# Altium PCB PCB3_fresa_v1.1B.pcbdoc
Units mm, origin at the board's own origin, x right, y up, seen from the top; angles counter-clockwise.
Board outline 180.34 x 129.54 mm, 2 copper layers (Top Layer, Bottom Layer); 89 components, 63 nets, 247 pads, 16 vias.
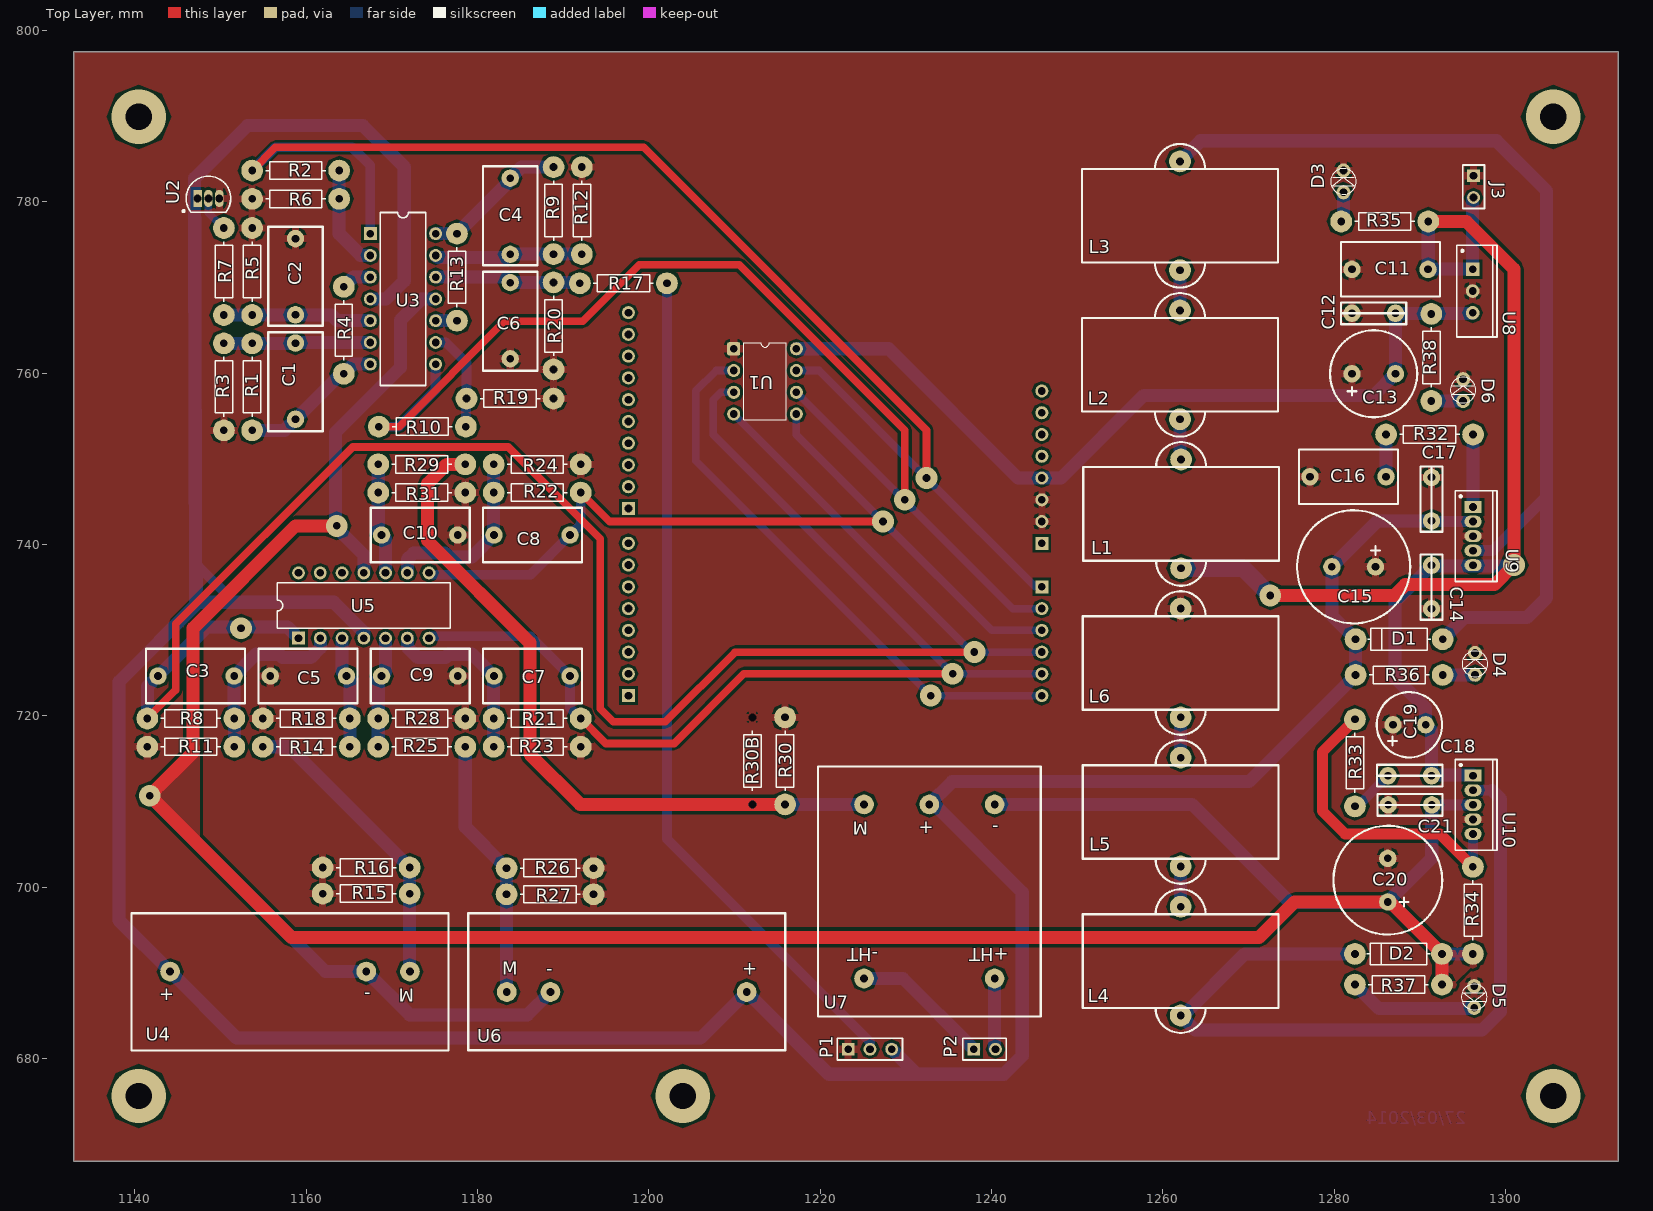
[diagram p0: Top Layer view]
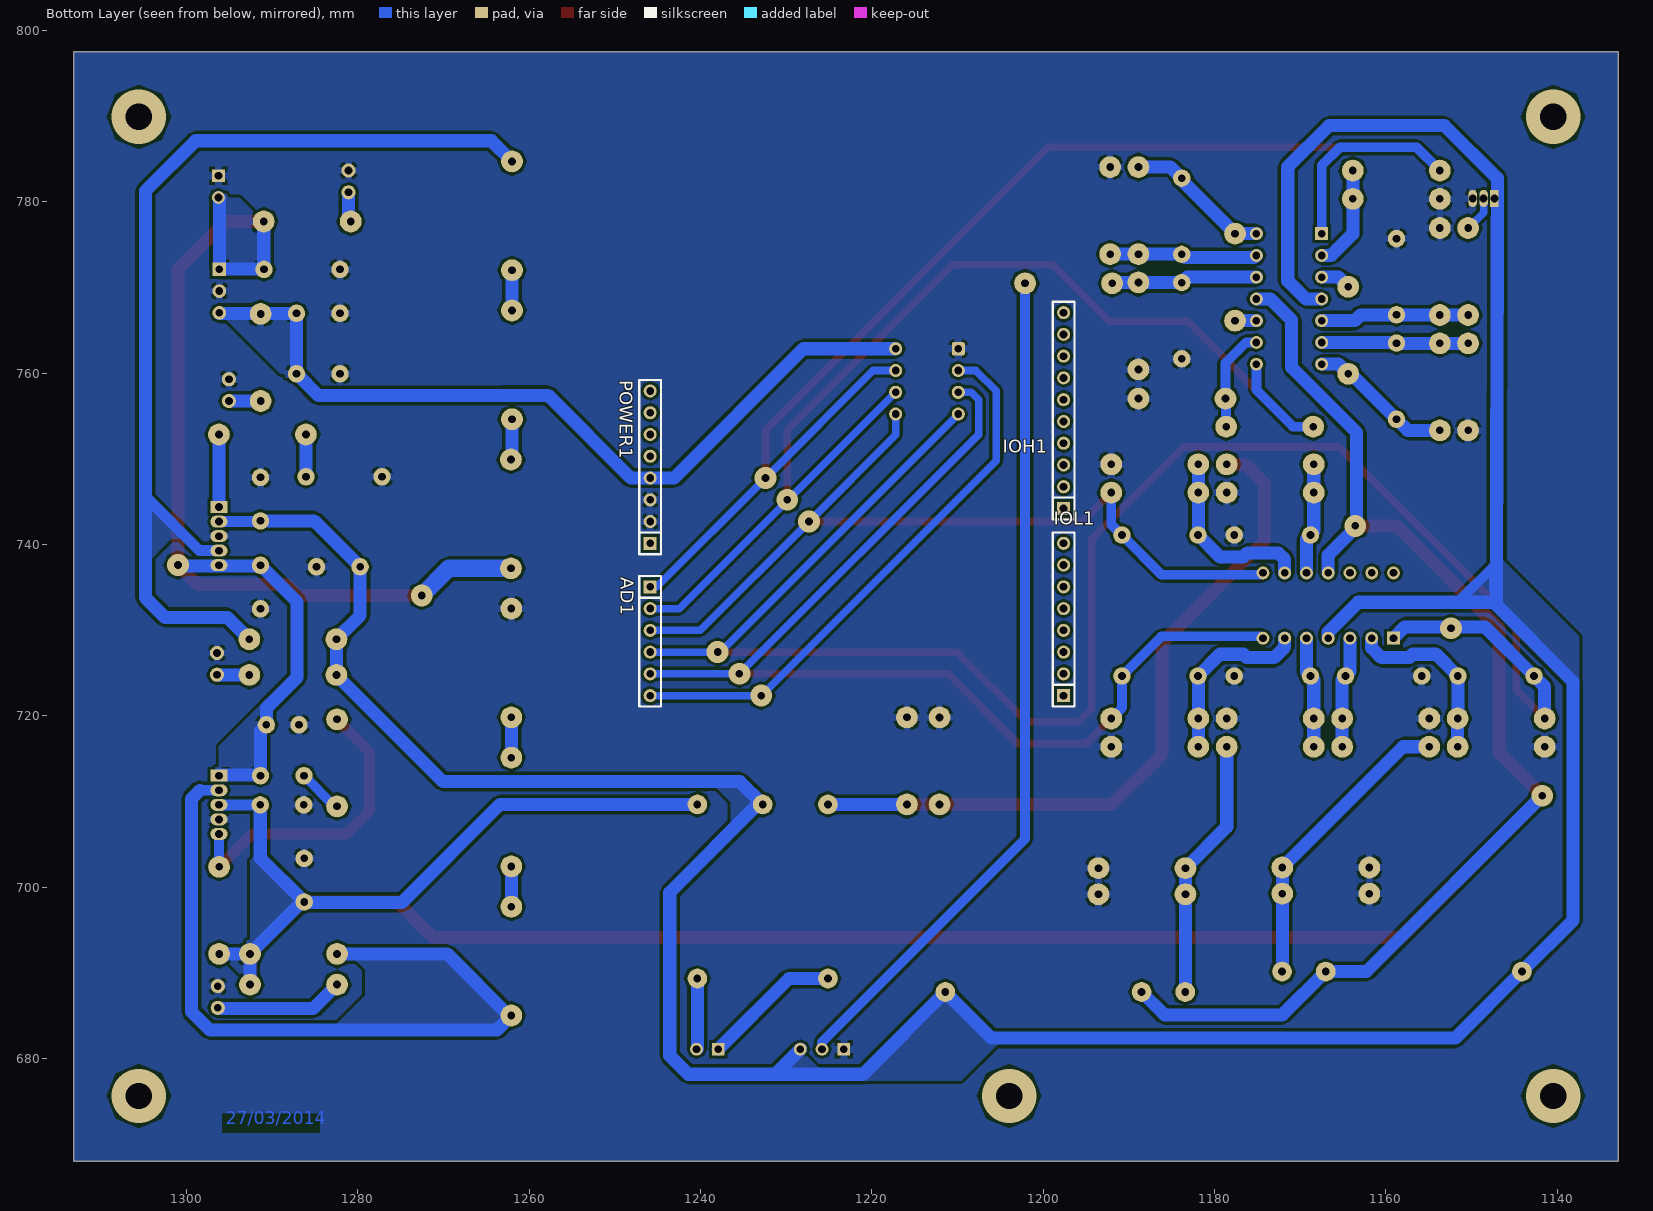
[diagram p1: Bottom Layer view, seen from below]

## Layer stack, top to bottom
Top Layer: signal copper 0.0356
Dielectric: dielectric 0.32, FR-4, Dk 4.8
Bottom Layer: signal copper 0.0356

## Board outline
1132.84,797.56 1313.18,797.56 1313.18,668.02 1132.84,668.02

## Design rules (kind name [scope] priority, off if disabled: settings)
Clearance [All] p1: gap=0.305
ComponentClearance [All] p1: gap=0.254 collisioncheckmode=3 verticalgap=0.762 showdistances=FALSE
HoleSize [All] p1: absolutevalues=TRUE maxlimit=6.35 minlimit=0.8 maxpercent=80.000 minpercent=20.000
HoleToHoleClearance [All] p1: gap=0.203 allowstackedmicrovias=TRUE
PlaneClearance [All] p1: clearance=0.762
PlaneConnect [All] p1: planeconnectstyle=Relief reliefexpansion=0.508 reliefentries=4 reliefconductorwidth=0.889 reliefairgap=0.203
PolygonConnect [All] p1: connectstyle=Relief reliefconductorwidth=0.889 reliefentries=4 polygonreliefangle="90 Angle"
RoomDefinition supplies [InComponentClass('supplies')] p1: confinementstyle=ConfineIn formatcopy=TRUE lockcomponents=FALSE outline 1299.386,682.625 1299.386,787.146 1250.186,787.146 1250.186,682.625
RoutingLayers [All] p1: top layer_v5=FALSE bottom layer_v5=TRUE
RoutingVias [All] p1: holewidth=0.9 width=1.524 viastyle="Through Hole" minholewidth=0.8 minwidth=1.524 maxholewidth=6.35 maxwidth=6.35
SilkscreenOverComponentPads [All] p1: minsilkscreentomaskgap=0.254
SolderMaskExpansion [All] p1: expansion=0.102
SupplyNets 3V3 [InNet('3V3')] p1: voltage=3.000
SupplyNets 5V_1 [InNet('5V')] p2: voltage=5.000
SupplyNets -15V_1 [InNet('-15V')] p3: voltage=-15.00
SupplyNets +15V_1 [InNet('+15V')] p4: voltage=15.00
SupplyNets +12V_1 [InNet('+12V')] p5: voltage=12.00
Width 5V [InNet('5V')] p1: maxlimit=1.524 minlimit=0.889 preferedwidth=1.143
Width -15V [InNet('-15V')] p2: maxlimit=2.032 minlimit=1.143 preferedwidth=1.524
Width +15V [InNet('+15V')] p3: maxlimit=2.032 minlimit=1.143 preferedwidth=1.524
Width +12V [InNet('+12V')] p4: maxlimit=2.54 minlimit=1.524 preferedwidth=2.032
Width [All] p5: maxlimit=1.524 minlimit=0.889 preferedwidth=1.143
21 further rules are at their usual default settings.

## Classes and differential pairs
component class arduinoshield: AD1 IOH1 IOL1 POWER1 U1
component class sensor: C1 C2 C3 C4 C5 C6 C7 C8 C9 C10 P1 P2 R1 R2 R3 R4 R5 R6 R7 R8 R9 R10 R11 R12 R13 R14 R15 R16 R17 R18 R19 R20 R21 R22 R23 R24 R25 R26 R27 R28 R29 R30 R30B R31 U2 U3 U4 U5 U6 U7
component class supplies: C11 C12 C13 C14 C15 C16 C17 C18 C19 C20 C21 D1 D2 D3 D4 D5 D6 J3 L1 L2 L3 L4 L5 L6 R32 R33 R34 R35 R36 R37 R38 U8 U9 U10

## Components (designator, comment, footprint, x,y, rotation, side; value= is the part's Value field where it differs from the comment)
AD1 "AD" "Header 6x1 8.5mm" 1245.87,735.076 r270 bottom locked
C1 "approved sub OK" cap33n63v 1158.748,763.524 r270 top locked
C2 "approved sub OK" cap33n63v 1158.748,766.826 r90 top locked
C3 "approved sub OK" cap33n63v 1151.585,724.662 r180 top locked
C4 "approved sub OK" cap33n63v 1183.818,773.887 r90 top locked
C5 "approved sub OK" cap33n63v 1164.7,724.662 r180 top locked
C6 "approved sub OK" cap33n63v 1183.818,770.585 r270 top locked
C7 "approved sub OK" cap33n63v 1181.913,724.662 r0 top locked
C8 "approved sub OK" cap33n63v 1181.913,741.121 r0 top locked
C9 "approved sub OK" cap33n63v 1168.798,724.662 r0 top locked
C10 "approved sub OK" cap33n63v 1168.798,741.121 r0 top locked
C11 "approved sub OK" cap33n63v 1282.063,772.135 r0 top locked
C12 "approved sub OK" cap100n 1282.063,767.004 r0 top locked
C13 "approved sub OK" cap1000u25v 1282.063,759.943 r0 top locked
C14 "approved sub OK" cap100n 1291.36,732.511 r90 top locked
C15 "approved sub OK" cap2200u25v 1284.806,737.413 r180 top locked
C16 "approved sub OK" cap33n63v 1277.161,747.928 r0 top locked
C17 "approved sub OK" cap100n 1291.36,747.852 r270 top locked
C18 "approved sub OK" cap100n 1286.28,713.029 r0 top locked
C19 "approved sub OK" cap100u35v 1286.864,718.972 r0 top locked
C20 "approved sub OK" cap470u50v 1286.254,698.297 r90 top locked
C21 "approved sub OK" cap100n 1291.385,709.625 r180 top locked
D1 "MUR160" DO-41 1287.575,728.955 r90 top locked
D2 "MUR160" DO-41 1287.499,692.226 r90 top locked
D3 "LED" LED-3MM-BLUE 1281.073,781.126 r90 top locked
D4 "LED" LED-3MM-BLUE 1296.44,724.814 r90 top locked
D5 "LED" LED-3MM-BLUE 1296.338,688.467 r270 top locked
D6 "LED" LED-3MM-BLUE 1295.043,756.768 r90 top locked
IOH1 "IOH" "Header 10x1 8.5mm" 1197.61,744.22 r90 bottom locked
IOL1 "IOL" "Header 8x1 8.5mm" 1197.61,722.376 r90 bottom locked
J3 "Header 2" HDR1X2 1296.262,783.057 r270 top locked
L1 "INDC_180u_Toroid" Inductor 1262.124,743.585 r180 top locked
L2 "INDC_180u_Toroid" Inductor 1261.997,760.984 r180 top locked
L3 "INDC_180u_Toroid" Inductor 1261.997,778.383 r180 top locked
L4 "INDC_180u_Toroid" Inductor 1262.073,691.388 r180 top locked
L5 "INDC_180u_Toroid" Inductor 1262.073,708.787 r180 top locked
L6 "INDC_180u_Toroid" Inductor 1262.073,726.186 r180 top locked
P1 "Header 3" HDR1X3 1223.264,681.101 r0 top locked
P2 "Header 2" HDR1X2 1237.92,681.101 r0 top locked
POWER1 "POWER_UNO" "Header 8x1 8.5mm" 1245.87,740.156 r90 bottom locked
R1 "Carbon Film" RESTH_AXIAL-0.4#1 1153.693,758.419 r270 top locked
R2 "Carbon Film" RESTH_AXIAL-0.4#1 1158.773,783.666 r0 top locked
R3 "Carbon Film" RESTH_AXIAL-0.4#1 1150.391,758.419 r90 top locked
R4 "Carbon Film" RESTH_AXIAL-0.4#1 1164.387,765.023 r270 top locked
R5 "Carbon Film" RESTH_AXIAL-0.4#1 1150.391,771.881 r270 top locked
R6 "Carbon Film" RESTH_AXIAL-0.4#1 1158.773,780.364 r180 top locked
R7 "Carbon Film" RESTH_AXIAL-0.4#1 1153.693,771.881 r90 top locked
R8 "Carbon Film" RESTH_AXIAL-0.4#1 1146.531,719.709 r180 top locked
R9 "Carbon Film" RESTH_AXIAL-0.4#1 1188.872,778.993 r90 top locked
R10 "Carbon Film" RESTH_AXIAL-0.4#1 1173.556,753.77 r0 top locked
R11 "Carbon Film" RESTH_AXIAL-0.4#1 1146.531,716.407 r0 top locked
R12 "Carbon Film" RESTH_AXIAL-0.4#1 1192.174,778.993 r270 top locked
R13 "Carbon Film" RESTH_AXIAL-0.4#1 1177.595,771.22 r90 top locked
R14 "Carbon Film" RESTH_AXIAL-0.4#1 1160.01,716.407 r0 top locked
R15 "Carbon Film" RESTH_AXIAL-0.4#1 1167.003,699.262 r180 top locked
R16 "Carbon Film" RESTH_AXIAL-0.4#1 1167.003,702.31 r180 top locked
R17 "Carbon Film" RESTH_AXIAL-0.4#1 1197.026,770.509 r180 top locked
R18 "Carbon Film" RESTH_AXIAL-0.4#1 1160.01,719.709 r180 top locked
R19 "Carbon Film" RESTH_AXIAL-0.4#1 1183.792,757.047 r0 top locked
R20 "Carbon Film" RESTH_AXIAL-0.4#1 1188.872,765.531 r270 top locked
R21 "Carbon Film" RESTH_AXIAL-0.4#1 1186.967,719.709 r0 top locked
R22 "Carbon Film" RESTH_AXIAL-0.4#1 1186.967,746.074 r0 top locked
R23 "Carbon Film" RESTH_AXIAL-0.4#1 1186.967,716.407 r180 top locked
R24 "Carbon Film" RESTH_AXIAL-0.4#1 1186.967,749.376 r180 top locked
R25 "Carbon Film" RESTH_AXIAL-0.4#1 1173.488,716.407 r180 top locked
R26 "Carbon Film" RESTH_AXIAL-0.4#1 1188.466,702.234 r0 top locked
R27 "Carbon Film" RESTH_AXIAL-0.4#1 1188.466,699.186 r0 top locked
R28 "Carbon Film" RESTH_AXIAL-0.4#1 1173.488,719.709 r0 top locked
R29 "Carbon Film" RESTH_AXIAL-0.4#1 1173.488,749.376 r180 top locked
R30 "Carbon Film" RESTH_AXIAL-0.4#1 1215.898,714.756 r90 top locked
R30B "Carbon Film" RESTH_AXIAL-0.4#2 1212.088,714.756 r90 top
R31 "Carbon Film" RESTH_AXIAL-0.4#1 1173.488,746.074 r0 top locked
R32 "Carbon Film" RESTH_AXIAL-0.4#1 1291.131,752.856 r180 top locked
R33 "Carbon Film" RESTH_AXIAL-0.4#1 1282.419,714.527 r90 top locked
R34 "Carbon Film" RESTH_AXIAL-0.4#1 1296.186,697.306 r90 top locked
R35 "Carbon Film" RESTH_AXIAL-0.4#1 1285.899,777.723 r0 top locked
R36 "Carbon Film" RESTH_AXIAL-0.4#1 1287.575,724.789 r180 top locked
R37 "Carbon Film" RESTH_AXIAL-0.4#1 1287.499,688.645 r0 top locked
R38 "Carbon Film" RESTH_AXIAL-0.4#1 1291.334,761.848 r90 top locked
U1 "TL7726" DIP8-300 1213.561,759.054 r0 top locked
U2 "LM35" Z03A 1148.588,780.415 r270 top locked
U3 "LM324AJ" J014 1171.296,768.68 r270 top locked
U4 "LA150-P" LA150-P 1172.108,690.169 r180 top locked
U5 "LM324AJ" J014 1166.724,732.892 r0 top locked
U6 "LA150-P" LA150-P 1183.411,687.781 r0 top locked
U7 "LV20-P" LV20-P 1240.358,689.356 r180 top locked
U8 "LM7805" T03B 1296.161,769.595 r270 top locked
U9 "LM2577" T05A 1296.211,740.994 r270 top locked
U10 "LM2575-15" T05A 1296.211,709.625 r270 top locked

## Footprints (in the part's own frame and the unit in brackets; to place one, negate y for a bottom-side part, rotate by r counter-clockwise, add the part's x,y. Pads: shape width x height; smd on the part's side, far side on the other; paste and mask are expansions set on the pad)
cap33n63v [mil]
  round 80 hole 35.43: 1(0,0) 2(350,0)
  silkscreen extent -50,-125 405,125
cap100n [mil]
  round 80 hole 35.43: 1(0,0) 2(200,0)
  silkscreen extent -50,-50 250,50
cap100u35v [mil]
  round 80 hole 35.43: 1(0,0) 2(150,0)
  silkscreen extent -75,-150 225,150
cap470u50v [mil]
  round 80 hole 35.43: 1(0,0) 2(200,0)
  silkscreen extent -150,-250 350,250
cap1000u25v [mil]
  round 80 hole 35.43: 1(0,0) 2(200,0)
  silkscreen extent -100,-200 300,200
cap2200u25v [mil]
  round 80 hole 35.43: 1(0,0) 2(200,0)
  silkscreen extent -160,-260 360,260
DIP8-300 [mil] "DIP, 8-Leads, 0.300\" lead span , 0.100\" lead pitch, IPC Density A"
  round 39.37 on Mech14: 0(0,0)
  rrect25% 60x60 hole 35.43: 1(-144,150)
  round 60 hole 35.43: 2(-144,50) 3(-144,-50) 4(-144,-150) 5(144,-150) 6(144,-50) 7(144,50) 8(144,150)
  silkscreen extent -98,-177 98,177, body extent -98,-177 98,177, height 210
DO-41 [mm] "Diode, thru-hole"
  round 2.54 hole 0.9: A(0,-5.08) K(0,5.08)
  silkscreen extent -1.27,-3.68 1.27,3.68
HDR1X2 [mm] "Connector; Header; 2 Position"
  rect 1.5x1.5 hole 0.9: 1(0,0)
  round 1.5 hole 0.9: 2(2.54,0)
  silkscreen extent -1.27,-1.27 3.81,1.27
HDR1X3 [mm] "Connector; Header; 3 Position"
  rect 1.5x1.5 hole 0.9: 1(0,0)
  round 1.5 hole 0.9: 2(2.54,0) 3(5.08,0)
  silkscreen extent -1.27,-1.27 6.35,1.27
"Header 6x1 8.5mm" [mil] "Stackable 6 pin header"
  rect 60x60 hole 35.43: 1(0,0)
  round 60 hole 35.43: 2(100,0) 3(200,0) 4(300,0) 5(400,0) 6(500,0)
  silkscreen extent -50,-50 550,50
"Header 8x1 8.5mm" [mil] "Stackable 8 pin header"
  rect 60x60 hole 35.43: 1(0,0)
  round 60 hole 35.43: 2(100,0) 3(200,0) 4(300,0) 5(400,0) 6(500,0) 7(600,0) 8(700,0)
  silkscreen extent -50,-50 750,50
"Header 10x1 8.5mm" [mil] "Stackable 10 pin header"
  rect 60x60 hole 35.43: 1(0,0)
  round 60 hole 35.43: 2(100,0) 3(200,0) 4(300,0) 5(400,0) 6(500,0) 7(600,0) 8(700,0) 9(800,0) 10(900,0)
  silkscreen extent -50,-50 950,50
Inductor [mm] "Toroidal Inductor"
  round 2.54 hole 0.9: 1(0,6.35) 2(0,-6.35)
  silkscreen extent -11.43,-8.38 11.43,8.38
J014 [mm] "DIP; 14 Leads; Row Spacing 7.62 mm; Pitch 2.54 mm"
  rect 1.5x1.5 hole 0.9: 1(-7.62,-3.81)
  round 1.5 hole 0.9: 2(-5.08,-3.81) 3(-2.54,-3.81) 4(0,-3.81) 5(2.54,-3.81) 6(5.08,-3.81) 7(7.62,-3.81) 8(7.62,3.81) 9(5.08,3.81) 10(2.54,3.81) 11(0,3.81) 12(-2.54,3.81) 13(-5.08,3.81) 14(-7.62,3.81)
  silkscreen extent -10.1,-2.65 10.1,2.65
LA150-P [mm] "Current Transducer"
  round 2.3 hole 0.9: 1(0,0) 2(5.1,0) 3(28,0)
  silkscreen extent -4.5,-6.8 32.5,9.2
LED-3MM-BLUE [mil]
  round 65 hole 35.43: A(0,0) K(100,0)
  silkscreen extent -9,-59 109,59, body extent -15,-63 114,67, height 250
LV20-P [mm] "Voltage Transducer LV 20-P"
  round 2.3 hole 0.9: 1(0,-20.32) 2(7.62,-20.32) 3(15.24,-20.32) 4(0,0) 5(15.24,0)
  silkscreen extent -5.38,-24.76 20.62,4.44
RESTH_AXIAL-0.4#1 [mm]
  round 2.54 hole 0.9: 1(-5.08,0) 2(5.08,0)
  silkscreen extent -3.5,-1.02 3.5,1.02
RESTH_AXIAL-0.4#2 [mm]
  round 0 / inner round 0 / far side round 2.54 hole 0.914: 1(-5.08,0) 2(5.08,0)
  silkscreen extent -3.5,-1.02 3.5,1.02, body extent -5.38,-1.28 5.38,1.28, height 2.6
T03B [mm] "TO, Thru-Hole, Vertical, Heatsink Mounted; 3 In-Line Leads; Pitch 2.54 mm"
  rect 1.6x1.6 hole 0.9: 1(-2.54,0)
  round 1.6 hole 0.9: 2(0,0) 3(2.54,0)
  silkscreen extent -5.35,-1.85 5.35,2.85, body extent -5.35,-1.85 5.35,2.85, height 19.4
T05A [mm] "TO, Thru-Hole, Vertical, Heatsink Mounted; 5 In-Line Leads; Pitch 1.70 mm"
  rect 1.4x2 hole 0.9: 1(-3.4,0)
  oval 1.4x2 hole 0.9: 2(-1.7,0) 3(0,0) 4(1.7,0) 5(3.4,0)
  silkscreen extent -5.3,-2.1 5.3,2.8, body extent -5.3,-2.1 5.3,2.8, height 15.9
Z03A [mm] "TO, Flat Index; 3 In-Line, Axial Leads; Body Dia. 5mm; Leads 0.55 x 0.50 mm (max)"
  rect 2x1 hole 0.9: 1(0,-1.27)
  oval 2x1 hole 0.9: 2(0,0) 3(0,1.27)
  silkscreen extent -2.6,-3.02 1.6,2.6, body extent -2.61,-2.61 1.6,2.61, height 5.2

## Part data
C1 C2 C3 C4 C5 C6 C7 C8 C9 C10 C11 C12 C13 C14 C15 C16 C17 C18 C19 C20 C21: library part CAPC_330n_0805, "Capacitor SMD Cer 330nF 10% 25V X7R 0805"
D1 D2: library part DIODE_1N4007_1000V_1.0A_DO-41, "Diode 1N4007 1A 1000V THD"
D3 D4 D5 D6: library part LED-BLUE-3MM, "LED-BLUE-3MM"
J3 P2: "Header, 2-Pin"
L1 L2 L3 L4 L5 L6: "Power Inductor 180µH 10% SMD Toroid"
P1: "Header, 3-Pin"
R1 R2 R3 R4 R5 R6 R7 R8 R9 R10 R11 R12 R13 R14 R15 R16 R17 R18 R19 R20 R21 R22 R23 R24 R25 R26 R27 R28 R29 R30 R30B R31 R32 R33 R34 R35 R36 R37 R38: library part RES_1K_Axial_0.25W_5%, "Resistor THD Axial 1k Ohm 0.25W 5% Carbon Film"
U1: "Hex Clamping Circuit - Overvoltage Limiter"
U2: library part LM35CAZ, "Precision Centigrade Temperature Sensor, 3-pin TO-92"
U3 U5: "Quadruple Operational Amplifier"
U4 U6: "Current Transducer"
U7: "Voltage Transducer"
U8: library part LM78M05CT, "3-Terminal Positive Voltage Regulators, 3-pin TO-220"
U9: "Boost"
U10: library part LM2575, "Buck"

## Via types
v1: diameter 2.54, hole 0.9, Top Layer to Bottom Layer, 11 vias
v2: diameter 6.35, hole 3.048, Top Layer to Bottom Layer, 5 vias

## Nets (pads, with @x,y where several pads share a name; then routed paths per layer and width w, separated by ;. In a path a pad name is that pad's centre, name@x,y a point inside that pad or via, vN(x,y) a via of type N, cw(c..) or ccw(c..) an arc to the next point about the centre after c; other vN are vias at no path point)
3V3: POWER1.5
5V: C12.2 C13.2 POWER1.4 R38.2 U1.8 U8.3 | length 97.3
  Bottom Layer w1.524: U1.8 1227.988,762.864 1243.076,747.776 POWER1.4 1248.131,747.776 1257.783,757.428 1263.154,757.428 1263.18,757.403 1284.603,757.403 C13.2 C12.2 U8.3@1296.11,767.004
+12V: C11.2 C14.2 C18.2 C19.2 J3.2 L1.1 R35.2 U8.1 U9.5 U10.1 | length 150.3
  Top Layer w1.524: v1(1272.54,734.06) 1287.018,734.06 1288.288,735.33 1298.702,735.33 v1(1300.988,737.616) 1300.988,772.16 1295.425,777.723 R35.2 ; C14.2 C14.2@1291.363,737.594
  Bottom Layer w1.524: R35.2 1290.979,772.16 1296.136,772.16 U8.1 1296.161,780.416 J3.2 ; C18.2 C18.2@1291.36,713.105 ; C14.2@1291.36,737.514 U9.5@1296.211,737.514 ; C14.2 1287.069,733.3 1287.069,724.51 1290.674,720.905 C19.2 1291.36,718.287 C18.2@1291.36,713.105 ; U10.1@1296.211,713.105 C18.2@1291.36,713.105 ; U9.5@1296.211,737.518 v1@1300.966,737.518 ; v1@1300.966,737.594 v1(1300.988,737.616)
  Bottom Layer w2.032: L1.1 1269.365,737.235 v1(1272.54,734.06)
+15V: C15.2 C17.2 D1.K P1.3 R36.2 U2.1 U3.4 U4.3 U5.4 U6.3 U7.2 U9.2 | length 412.6
  Bottom Layer w1.143: 1147.293,737.591 1147.318,737.565 1151.611,733.273
  Bottom Layer w1.27: 1147.318,734.822 1147.318,737.565 ; C17.2@1291.461,742.694 U9.2
  Bottom Layer w1.524: 1146.975,778.115 1146.975,782.815 ; 1146.988,778.102 1147.064,733.552 ; 1147.051,782.815 1153.16,788.924 1166.622,788.924 1171.448,784.098 1171.448,770.788 1169.34,768.68 U3.4 ; U5.4 1166.724,729.775 1163.226,733.273 1151.611,733.273 1147.42,733.273 1138.174,724.027 1138.174,696.103 U4.3 1151.881,682.396 1206.027,682.396 U6.3 1221.013,678.18 1231.265,678.18 ; P1.3 1231.265,678.18 ; C17.2@1291.461,742.671 C17.2 1285.086,742.772 C15.2 1279.726,731.723 D1.K R36.2 1270.049,712.343 1241.473,712.343 1241.466,712.35 1239.251,712.35 1239.244,712.343 1235.405,712.343 U7.2 1233.297,709.676 1243.584,699.389 1243.584,680.339 1241.425,678.18 1231.265,678.18
-15V: C20.1 C21.1 D2.A R34.1 R37.2 U3.11 U4.2 U5.11 U6.2 U7.1 U10.3 | length 391.7
  Top Layer w1.524: v1(1141.73,710.692) 1158.265,694.157 1271.245,694.157 1275.385,698.297 C20.1 1286.508,698.297 D2.A R37.2 ; v1@1141.755,710.717 1146.81,715.772 1146.81,730.25 1158.748,742.188 v1(1163.574,742.188) ; U7.1@1240.358,709.422 U7.1
  Bottom Layer w1.27: C21.1 U10.3
  Bottom Layer w1.524: v1(1141.73,710.692) 1162.253,690.169 U4.2 1172.07,685.107 1185.837,685.107 U6.2 ; U5.11 1166.724,738.784 1163.396,742.112 1163.396,753.085 1170.991,760.679 1170.991,766.191 1173.48,768.68 U3.11 ; U7.1 1263.396,709.676 1274.826,698.246 1286.203,698.246 C20.1 ; C21.1 1291.385,703.428 C20.1 ; R37.2 D2.A ; R34.1 D2.A ; C20.1 1286.508,698.297 D2.A
AD0: AD1.1 R2.1 U1.7 U3.1 | length 162
  Top Layer w0.889: R2.1 1156.411,786.384 1199.388,786.384 1232.408,753.364 v1(1232.408,747.776)
  Bottom Layer w0.889: U1.7 1219.86,760.324 v1(1232.408,747.776) 1245.108,735.076 AD1.1
  Bottom Layer w1.143: R2.1 1156.411,786.384 1165.352,786.384 1167.486,784.25 U3.1
AD1: AD1.2 R10.1 U1.6 U3.8 | length 135.9
  Top Layer w0.889: R10.1 1170.838,753.77 1183.132,766.064 1192.276,766.064 1198.88,772.668 1210.564,772.668 1229.868,753.364 v1(1229.868,745.236)
  Bottom Layer w0.889: U1.6 1242.466,732.536 AD1.2
  Bottom Layer w1.143: R10.1 1170.838,753.77 1175.106,758.038 U3.8
AD2: AD1.3 C8.2 R22.2 U1.5 U5.8 | length 101.6
  Top Layer w0.889: R22.2@1192.454,746.074 R22.2 1195.426,742.696 v1(1227.328,742.696)
  Bottom Layer w0.889: U1.5 1217.219,752.805 v1(1227.328,742.696) 1240.028,729.996 AD1.3
  Bottom Layer w1.143: U5.8 1174.559,736.486 1186.167,736.486 C8.2 1192.047,742.366 R22.2
AD3: AD1.4 C3.2 R8.2 U1.4 U5.1 | length 214.7
  Top Layer w0.889: R8.2 1144.778,723.036 1144.778,730.758 1165.416,751.395 1183.576,751.395 1194.308,740.664 1194.308,720.852 1195.832,719.328 1201.928,719.328 1210.056,727.456 v1(1237.996,727.456)
  Bottom Layer w0.889: U1.4 1237.691,727.456 v1(1237.996,727.456) AD1.4
  Bottom Layer w1.524: R8.2 1141.451,723.417 C3.2 1148.436,730.402 1157.795,730.402 U5.1@1159.104,729.094
  other v1: 1152.398,730.25
AD4: AD1.5 C7.2 R21.2 U1.3 U5.7 | length 128.7
  Top Layer w0.889: R21.2 1194.968,716.788 1202.944,716.788 1211.072,724.916 v1(1235.456,724.916)
  Bottom Layer w0.889: U1.3 1208.38,757.784 1207.516,756.92 1207.516,752.856 v1(1235.456,724.916) AD1.5
  Bottom Layer w1.143: U5.7 1174.559,729.298 1186.167,729.298 C7.2 1190.803,720.954 R21.2
AD5: AD1.6 U1.2 | length 65.3
  Bottom Layer w0.889: U1.2 1207.872,760.324 1205.484,757.936 1205.484,749.808 v1(1232.916,722.376) AD1.6
GND: C2.2 C5.2 C6.2 C9.2 C10.2 C11.1 C12.1 C13.1 C14.1 C15.1 C16.1 C17.1 C19.1 C20.2 C21.2 D3.K D4.K D5.A D6.K J3.1 L6.2 P1.1 POWER1.2 POWER1.3 R3.1 R6.2 R7.2 R11.1 R12.1 R15.2 R16.2 R18.2 R19.2 R20.2 R23.1 R24.1 R26.2 R27.2 R28.2 R30.2 R30B.2 R31.2 U1.1 U2.3 U8.2 U9.3 U10.4
IO0: IOL1.1
IO1: IOL1.2
IO2: IOL1.3
IO3: IOL1.4
IO4: IOL1.5
IO5: IOL1.6
IO6: IOL1.7
IO7: IOL1.8
IOREF: POWER1.7
MISO: 
MOSI: 
NetC1_1: C1.1 R1.1 R3.2 U3.6 | length 17.1
  Bottom Layer w1.524: R3.2 R1.1 1158.723,763.499 C1.1 1158.824,763.6 U3.6
NetC1_2: C1.2 R1.2 R4.2 U3.7 | length 17
  Bottom Layer w1.524: R1.2 1157.453,753.339 C1.2 1164.057,759.943 R4.2 1165.504,761.06 U3.7
NetC2_1: C2.1 R5.2 R7.1 U3.5 | length 17.4
  Bottom Layer w1.524: R5.2 R7.1 1158.723,766.801 C2.1 1162.939,766.826 1163.625,766.14 U3.5
NetC3_1: C3.1 R8.1 R11.2 U5.2 | length 21.2
  Bottom Layer w1.524: R11.2 R8.1 1151.585,719.734 C3.1 1154.125,727.202 1156.862,727.202 1157.257,726.808 1160.513,726.808 1161.644,727.939 U5.2
NetC4_1: C4.1 R9.1 R12.2 U3.13 | length 17.3
  Bottom Layer w1.524: U3.13 1175.36,773.506 1183.437,773.506 C4.1 1183.843,773.913 R9.1 R12.2
NetC4_2: C4.2 R9.2 R13.2 U3.14 | length 17.1
  Bottom Layer w1.524: U3.14 R13.2 1183.818,782.523 C4.2 1185.113,784.073 R9.2
NetC5_1: C5.1 R14.2 R18.1 U5.3 | length 13
  Bottom Layer w1.524: U5.3 1164.184,725.178 C5.1 1165.09,724.273 R18.1 R14.2
NetC6_1: C6.1 R17.2 R20.1 U3.12 | length 17.3
  Bottom Layer w1.524: U3.12 1183.183,771.22 C6.1 1188.847,770.585 R20.1 R17.2@1192.174,770.611
NetC7_1: C7.1 R21.1 R23.2 U5.6 | length 21.1
  Bottom Layer w1.524: U5.6 1171.804,728.04 1173.036,726.808 1176.241,726.808 1176.636,727.202 1179.373,727.202 C7.1 1181.887,724.637 R21.1 R23.2
NetC8_1: C8.1 R22.1 R24.2 U5.9 | length 21.5
  Bottom Layer w1.524: U5.9 1171.804,738.276 1172.531,739.003 1176.214,739.003 1176.636,738.581 1179.373,738.581 C8.1 1181.887,741.147 R22.1 R24.2
NetC9_1: C9.1 R25.2 R28.1 U5.5 | length 13
  Bottom Layer w1.524: R25.2 R28.1 1168.408,724.273 C9.1 1169.264,725.128 U5.5
NetC10_1: C10.1 R29.2 R31.1 U5.10 | length 13
  Bottom Layer w1.524: R29.2 R31.1 1168.408,741.511 C10.1 1169.264,740.656 U5.10
NetC16_2: C16.2 R32.2 | length 4.9
  Bottom Layer w1.524: C16.2 R32.2
NetC18_1: C18.1 R33.1 | length 5.3
  Bottom Layer w1.143: R33.1 1282.698,709.447 C18.1
NetD1_A: D1.A L3.2 U9.4 | length 119.1
  Bottom Layer w1.27: U9.4 1298.475,739.294 1304.798,745.617
  Bottom Layer w1.524: L3.2 1264.41,787.146 1298.931,787.146 1304.798,781.279 1304.798,745.617 1304.798,733.806 1302.512,731.52 1295.22,731.52 D1.A
NetD2_K: D2.K L4.1 U10.2 | length 90.7
  Bottom Layer w1.27: U10.2 1298.421,711.325
  Bottom Layer w1.524: D2.K 1269.568,692.226 1262.38,685.038 L4.1 1263.775,683.336 1297.254,683.336 1299.413,685.495 1299.413,710.333 1298.421,711.325
NetD3_A: D3.A R35.1 | length 3.5
  Bottom Layer w1.524: R35.1 1281.073,777.977 D3.A
NetD4_A: D4.A R36.1 | length 3.8
  Bottom Layer w1.524: R36.1 1296.414,724.789 D4.A
NetD5_K: D5.K R37.1 | length 15.1
  Bottom Layer w1.524: R37.1 1285.213,685.851 1296.262,685.851 D5.K
NetD6_A: D6.A R38.1 | length 3.7
  Bottom Layer w1.524: R38.1 D6.A
NetL1_2: L1.2 L2.1 | length 4.6
  Bottom Layer w1.524: L1.2@1261.997,750.062 L2.1
NetL2_2: L2.2 L3.1 | length 4.7
  Bottom Layer w1.524: L2.2 L3.1
NetL4_2: L4.2 L5.1 | length 4.7
  Bottom Layer w1.524: L4.2 L5.1
NetL5_2: L5.2 L6.1 | length 4.7
  Bottom Layer w1.524: L5.2 L6.1
NetP1_2: P1.2 R17.1 | length 99.2
  Bottom Layer w1.143: R17.1 1202.106,705.645 1225.804,681.947 P1.2
NetP2_1: P2.1 U7.5 | length 16.2
  Bottom Layer w1.524: U7.5 1229.665,689.356 P2.1
NetP2_2: P2.2 U7.4 | length 8.2
  Bottom Layer w1.524: P2.2@1240.358,681.203 U7.4
NetR2_2: R2.2 R6.1 U3.2 | length 12.1
  Bottom Layer w1.524: R2.2 R6.1 1163.853,776.277 1166.37,773.76 U3.2
NetR4_1: R4.1 U3.3 | length 3.6
  Bottom Layer w1.524: R4.1 1165.504,771.22 U3.3
NetR5_1: R5.1 U2.2 | length 4.2
  Bottom Layer w0.889: U2.2 1148.588,778.764 R5.1
NetR10_2: R10.2 R19.1 U3.9 | length 12.1
  Bottom Layer w1.143: U3.9 1176.299,763.6 1178.712,761.187 R19.1 1178.636,756.971 R10.2
NetR13_1: R13.1 U3.10 | length 2.5
  Bottom Layer w1.524: U3.10 R13.1
NetR14_1: R14.1 R15.1 R16.1 U4.1 | length 35.1
  Bottom Layer w1.524: R14.1 1157.986,716.407 R16.1 R15.1 U4.1@1172.083,690.194
NetR25_1: R25.1 R26.1 R27.1 U6.1 | length 30.6
  Bottom Layer w1.524: R25.1 1178.568,707.051 R26.1 R27.1 1183.386,687.807 U6.1
NetR29_1: R29.1 R30.1 R30B.1 U7.3 | length 83.3
  Top Layer w1.524: R29.1 1176.426,749.376 1174.166,747.116 1174.166,740.486 1186.104,728.548 1186.104,715.543 1191.971,709.676 R30B.1 R30.1
  Bottom Layer w1.524: R30.1 U7.3
NetR32_1: R32.1 U9.1 | length 8.2
  Bottom Layer w1.524: U9.1@1296.211,744.652 R32.1
NetR33_2: R33.2 R34.2 U10.5 | length 36.4
  Top Layer w1.27: R33.2 1278.611,715.799 1278.611,708.889 1281.278,706.222 1292.35,706.222 R34.2
  Bottom Layer w1.143: R34.2 1296.186,706.2 U10.5
RESET: POWER1.6
SCK: 
VIN: POWER1.1
pads on no net: IOH1.1 IOH1.2 IOH1.3 IOH1.4 IOH1.5 IOH1.6 IOH1.7 IOH1.8 IOH1.9 IOH1.10 POWER1.8 U1.0 U5.12 U5.13 U5.14
copper on no net:
  other v2: 1140.46,675.64 1203.96,675.64 1305.56,675.64 1140.46,789.94 1305.56,789.94

## Polygon pours and split planes (outlines as drawn)
-15V on Top Layer "Top Layer--15V" (solid, remove dead copper, pour order 20): 1292.606,687.324 1297.432,692.15 1292.655,692.15 1292.579,692.226
-15V on Top Layer "Bottom Layer-+12V" (solid, remove dead copper, pour order 34): 1147.572,716.534 1147.572,704.85 1141.73,710.692
GND on Top Layer "Top Layer-GND" (solid, remove dead copper, pour order 38): 1313.18,797.56 1132.84,797.56 1132.84,668.02 1313.18,668.02
+15V on Bottom Layer "Bottom Layer-+15V 6" (solid, pour order 32): 1147.064,738.937 1137.412,729.285 1137.412,723.544 1138.606,723.544 1147.75,732.688 1147.775,732.714 1151.941,732.714 1151.941,732.942 1147.293,737.591
+15V on Bottom Layer "Bottom Layer-+15V 5" (solid, pour order 25): 1228.369,681.076 1225.575,678.282 1225.575,678.205 1230.732,678.205 1231.036,678.51
NetD2_K on Bottom Layer "Bottom Layer-NetD2_K 2" (solid, pour order 35): 1262.581,685.039 1262.633,685.039 1264.412,683.26 1282.7,683.26 1282.7,683.844 1279.144,687.4 1279.144,690.372 1281.176,692.404 1280.998,692.226 1269.77,692.226
NetD2_K on Bottom Layer "Bottom Layer-NetD2_K 1" (solid, pour order 33): 1282.419,692.226 1280.033,692.226 1278.89,691.083 1278.89,688.848 1278.89,687.324 1282.827,683.387 1282.776,683.336 1263.775,683.336 1262.073,685.038 1269.262,692.226
+15V on Bottom Layer "Bottom Layer-+15V 3" (solid, pour order 28): 1232.865,709.803 1235.405,712.343 1238.631,712.343 1234.694,708.406 1234.694,707.898
+15V on Bottom Layer "Bottom Layer-+15V 2" (solid, pour order 27): 1232.916,709.676 1236.472,706.12 1236.472,709.93 1238.758,712.216
NetD1_A on Bottom Layer "Bottom Layer-NetD1_A" (solid, remove dead copper, pour order 21): 1304.798,745.49 1299.972,740.664 1301.75,740.664 1304.798,737.616
+12V on Bottom Layer "Bottom Layer-+12V" (solid, remove dead copper, pour order 22): 1296.262,780.517 1293.773,780.517 1290.979,777.723 1290.979,772.16 1296.136,772.16
5V on Bottom Layer "Bottom Layer-+12V" (solid, remove dead copper, pour order 23): 1287.143,759.943 1289.049,759.943 1296.161,767.055 1296.11,767.004 1287.143,767.004
+12V on Bottom Layer "Bottom Layer-+12V" (solid, remove dead copper, pour order 24): 1296.211,713.105 1296.211,716.485 1290.574,722.122 1290.674,722.022 1290.674,719.074 1290.674,718.744 1291.36,718.058 1291.36,713.105
-15V on Bottom Layer "Bottom Layer-+12V" (solid, remove dead copper, pour order 26): 1292.579,692.226 1292.325,692.226 1286.254,698.297 1291.385,703.428 1291.385,703.834 1291.844,703.834 1292.606,703.072 1292.579,703.045 1292.579,692.226
-15V on Bottom Layer "Bottom Layer-+12V" (solid, remove dead copper, pour order 29): 1296.186,692.226 1296.16,692.226 1292.579,688.645 1292.579,692.226
+15V on Bottom Layer "Bottom Layer-+12V" (solid, remove dead copper, pour order 30): 1237.742,712.343 1235.405,712.343 1235.202,712.14 1232.738,709.676 1233.297,709.676 1235.456,707.517 1235.456,709.676 1237.996,712.216
+15V on Bottom Layer "Bottom Layer-+12V" (solid, remove dead copper, pour order 31): 1211.411,687.781 1211.275,687.781 1205.23,681.736 1209.548,677.418 1221.232,677.418
NetD2_K on Bottom Layer "Top Layer-NetD2_K" (solid, remove dead copper, pour order 36): 1262.073,684.665 1265.682,688.274 1265.682,688.34 1265.682,685.546 1267.714,683.514 1267.536,683.336 1263.775,683.336
GND on Bottom Layer "Bottom Layer-GND" (solid, remove dead copper, pour order 37): 1313.18,797.56 1132.84,797.56 1132.84,668.02 1313.18,668.02

## Other copper
Bottom Layer:
  text "27/03/2014" at 1295.4,671.83 h2.54

## Silkscreen, mask and mechanical layers (free items; w line width, h text height)
Mechanical 15:
  the board outline again, w0.254

## Text inside footprints (layer, text, board x,y; h text height)
U4: Top Overlay "M" at 1172.616,688.137 h1.52 r180; Top Overlay "-" at 1167.516,688.137 h1.52 r180; Top Overlay "+" at 1144.616,688.137 h1.52 r180
U6: Top Overlay "M" at 1182.903,689.813 h1.52; Top Overlay "-" at 1188.003,689.813 h1.52; Top Overlay "+" at 1210.903,689.813 h1.52
U7: Top Overlay "-HT" at 1226.769,692.912 h1.52 r180; Top Overlay "+HT" at 1242.009,692.912 h1.52 r180; Top Overlay "M" at 1225.626,707.644 h1.52 r180; Top Overlay "+" at 1233.246,707.644 h1.52 r180; Top Overlay "-" at 1240.866,707.644 h1.52 r180